# Altium PCB DRIVER_GATE_BOARD_solar_boost_converter.PcbDoc
Units mm, origin at the board's own origin, x right, y up, seen from the top; angles counter-clockwise.
Board outline 30 x 30 mm, 2 copper layers (Top Layer, Bottom Layer), stack 2.071 mm thick; 23 components, 18 nets, 69 pads, 8 vias.
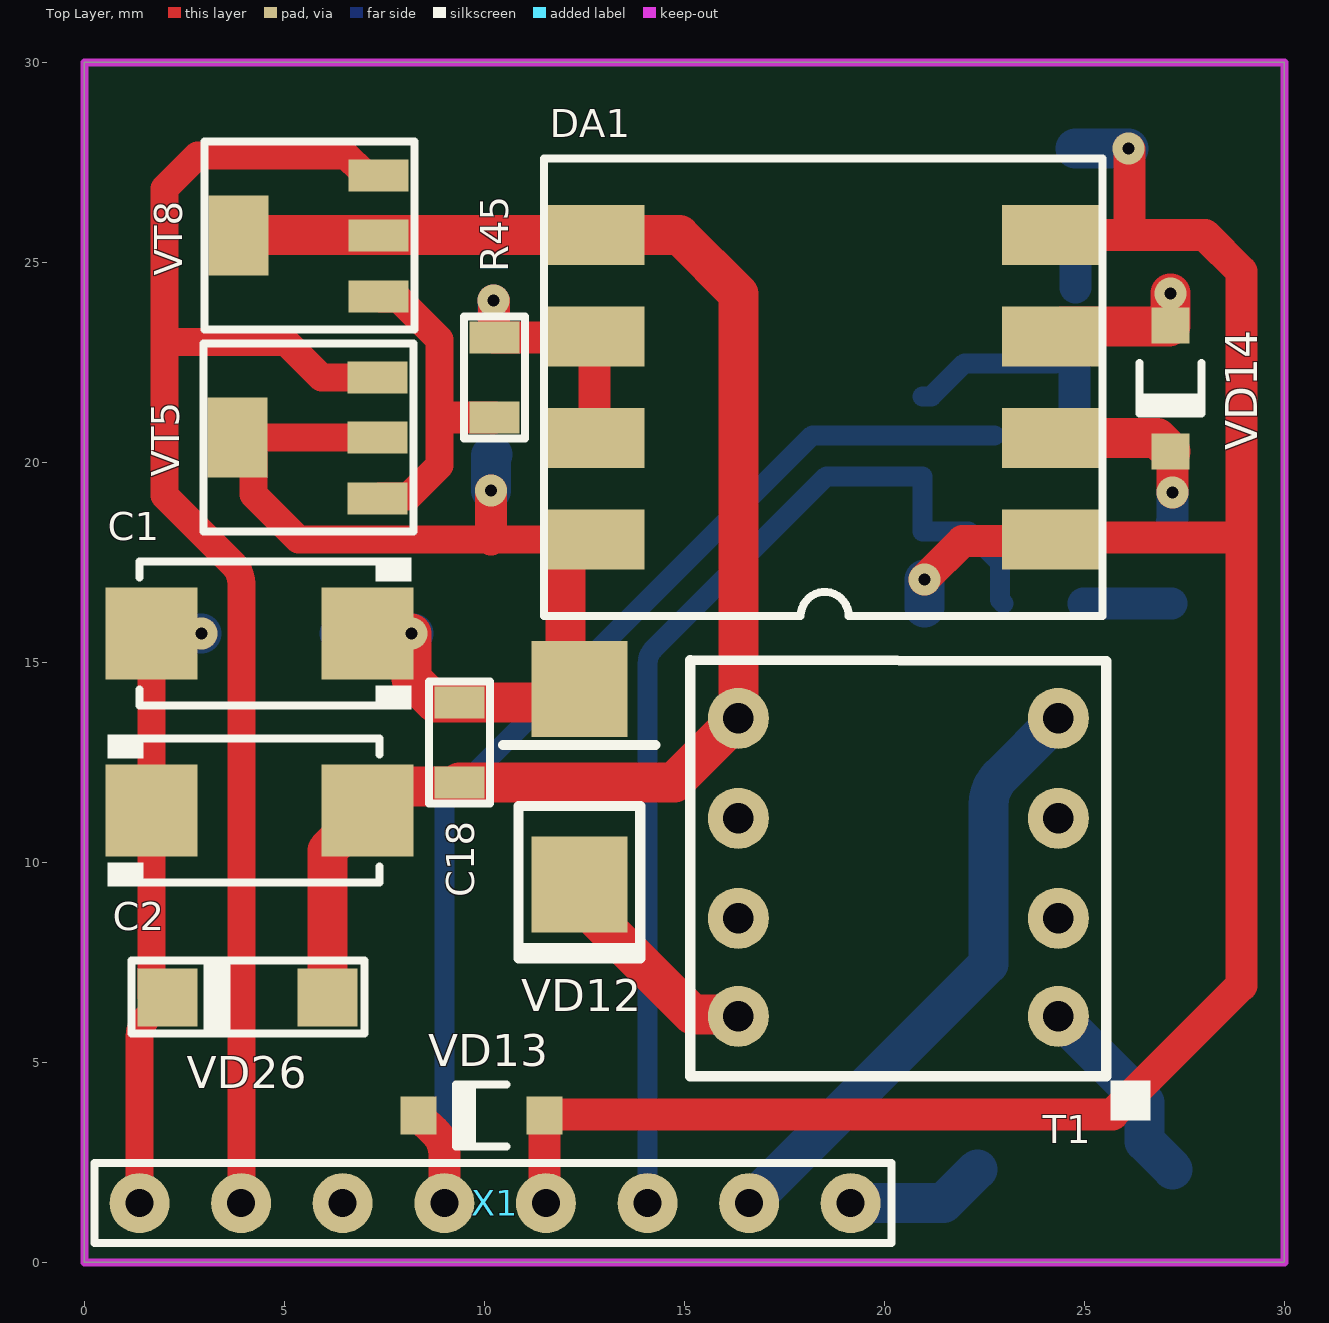
[diagram p0: Top Layer view]
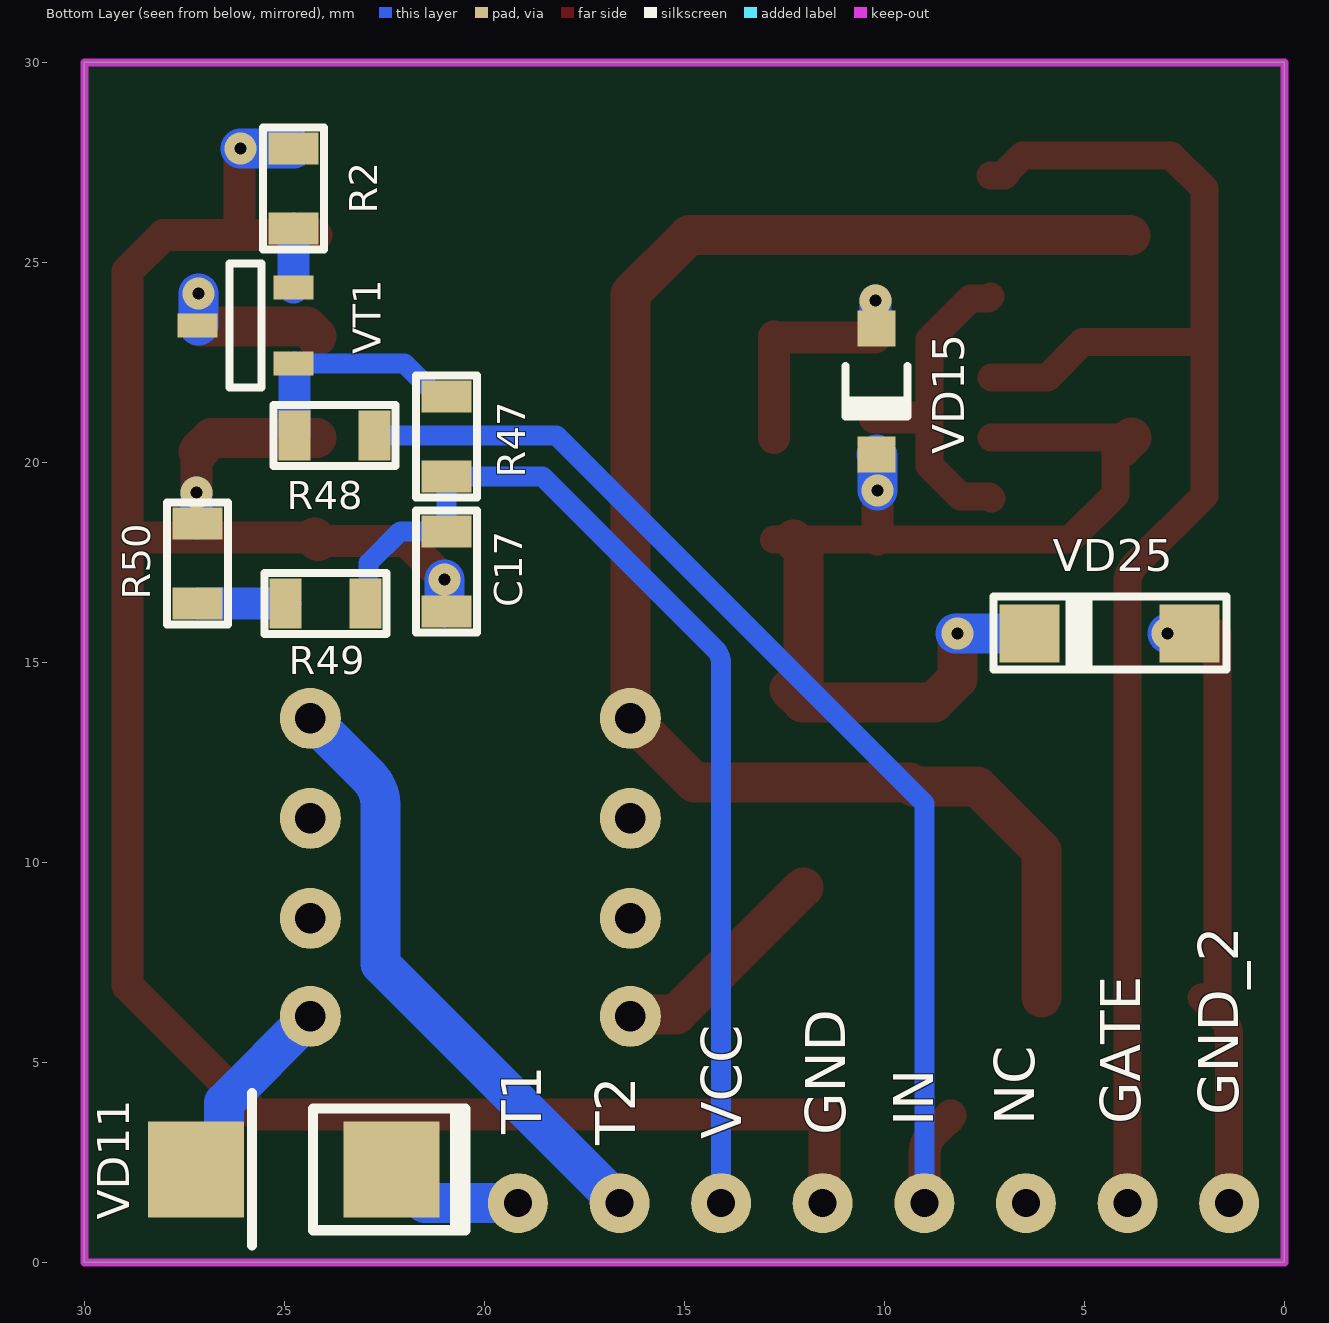
[diagram p1: Bottom Layer view, seen from below]
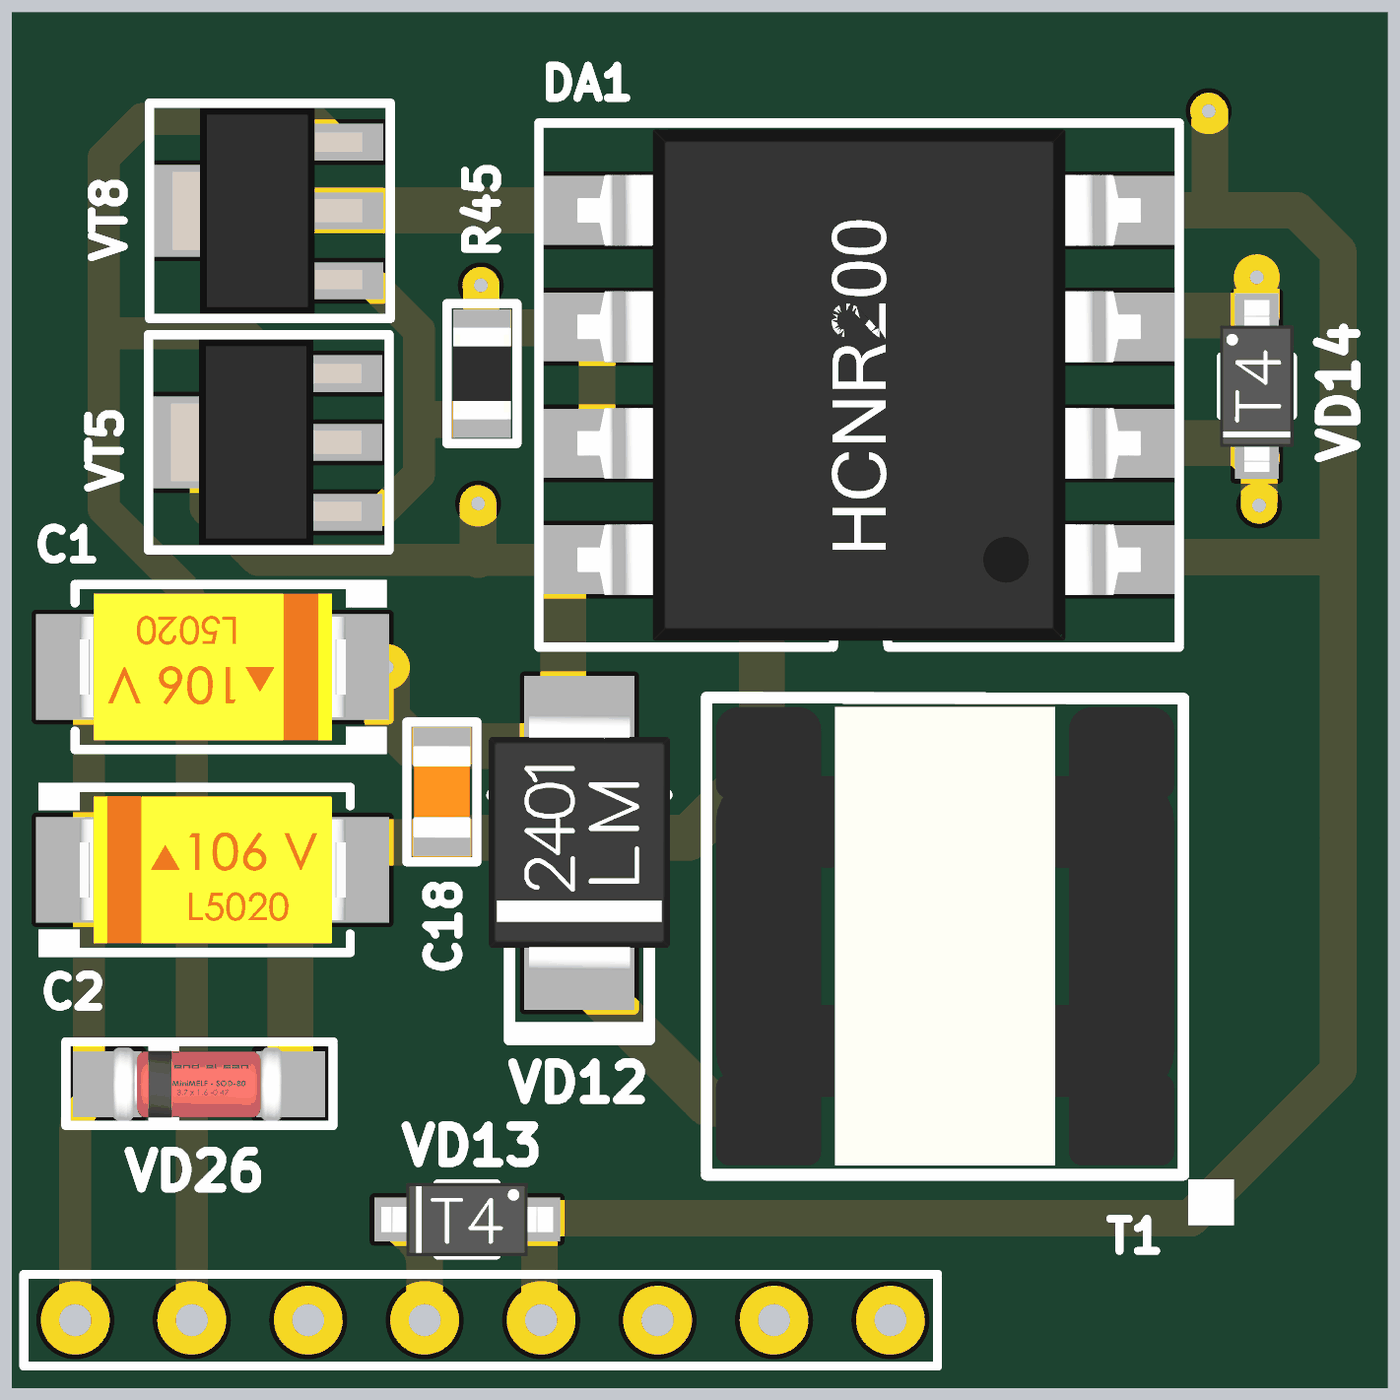
[diagram p2: 3D render of the assembled board from above, using the file's embedded part models]
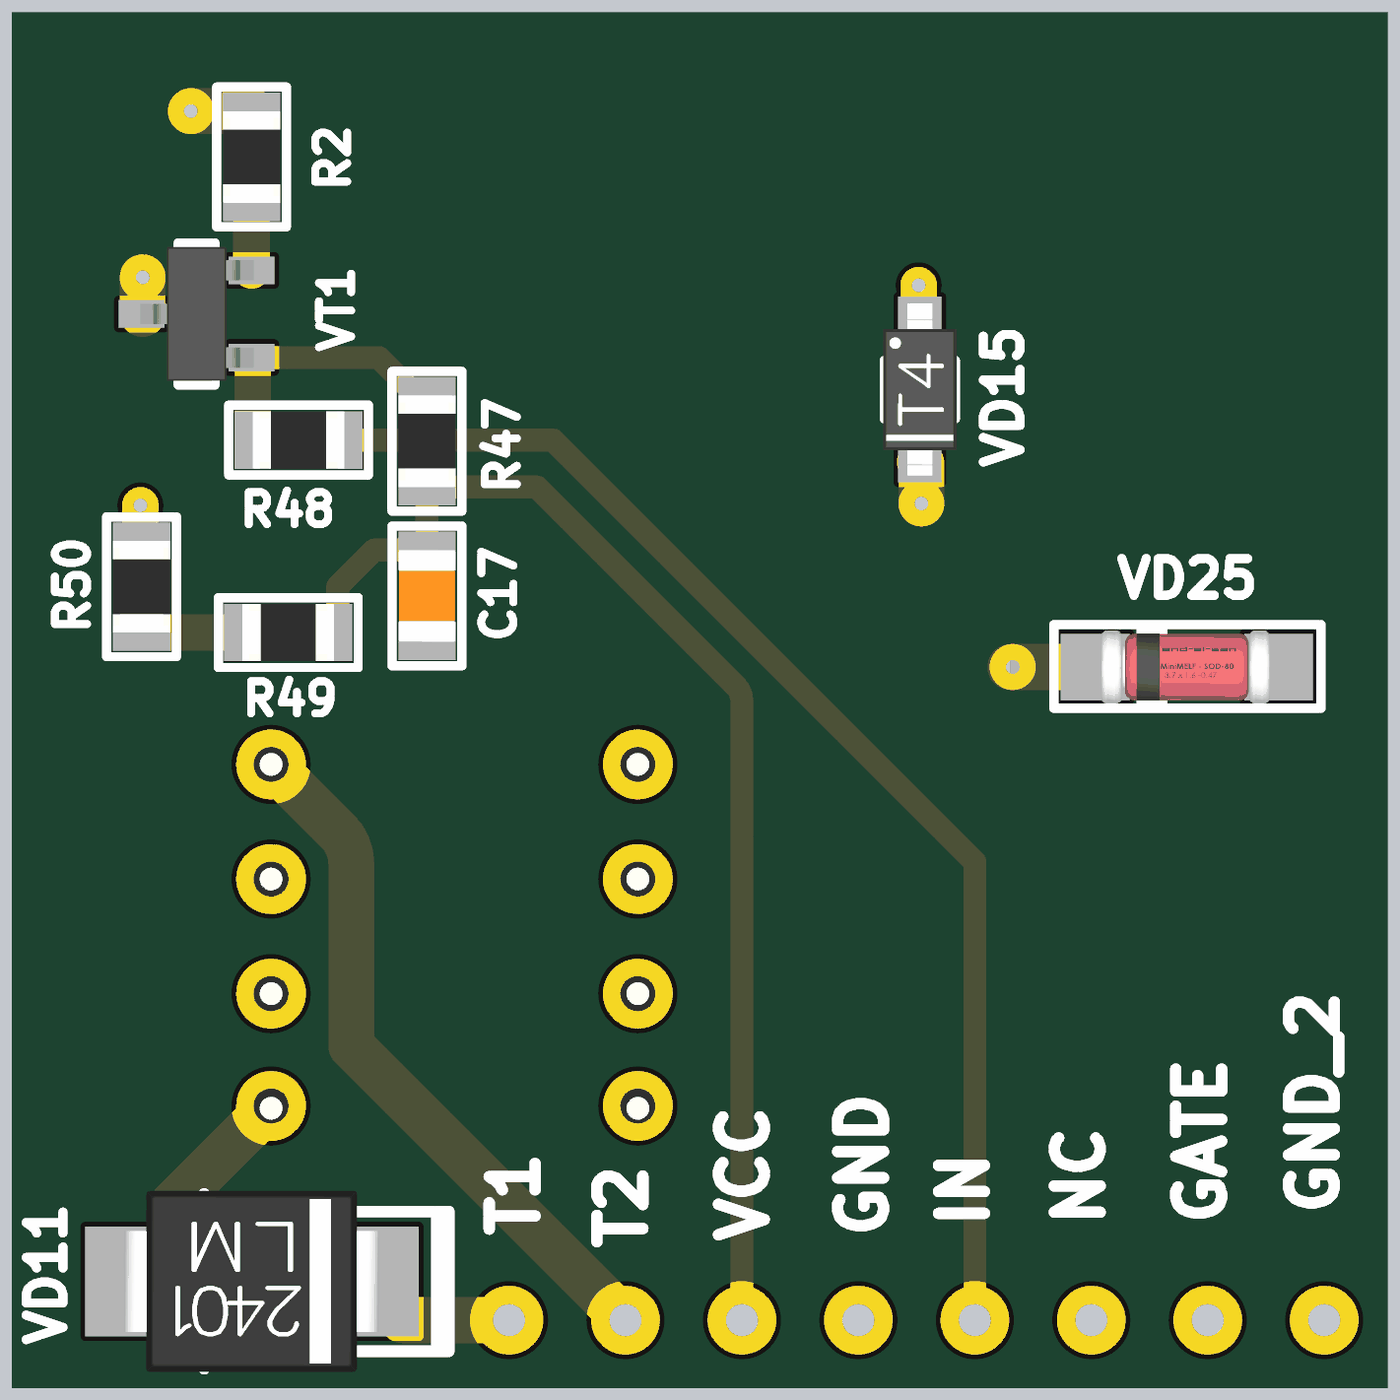
[diagram p3: 3D render of the assembled board from below, using the file's embedded part models]

## Layer stack, top to bottom
Top Solder: solder mask 0.0102, Solder Resist, Dk 3.5
Top Layer: signal copper 0.0356
Dielectric 1: dielectric 2, FR-4, Dk 4.8
Bottom Layer: signal copper 0.0356
Bottom Solder: solder mask 0.0102, Solder Resist, Dk 3.5

## Board outline
0,0 0,29.999 0,30 30,30 30,0

## Design rules (kind name [scope] priority, off if disabled: settings)
Clearance [All] p1: gap=0.8 ignorepadtopadclearanceinfootprint=TRUE except(0: Via-Hole Fill-Hole Text-Hole; 0.2: Arc-Track Arc-SMDPad Arc-THPad Arc-Via Arc-Fill Arc-Poly Arc-Region Arc-Text Arc-Hole; 0.25: Track-Track Track-SMDPad Track-THPad Track-Via Track-Fill Track-Poly Track-Region Track-Text Track-Hole; 0.254: Via-Via Via-Fill Via-Poly Via-Region Via-Text Fill-Fill Fill-Poly Fill-Region Fill-Text Text-Text; 0.4: Arc-Arc SMDPad-SMDPad SMDPad-THPad SMDPad-Via SMDPad-Fill SMDPad-Poly SMDPad-Region SMDPad-Text SMDPad-Hole)
ComponentClearance [All] p1: gap=-5 collisioncheckmode=3 verticalgap=0.254 showdistances=FALSE
DiffPairsRouting [All] p1: maxlimit=5 minlimit=0.254 mostfreqgap=0.254 toplayer_minwidth=0.381 toplayer_maxwidth=0.381 toplayer_prefwidth=0.381 bottomlayer_minwidth=0.381 bottomlayer_maxwidth=0.381 bottomlayer_prefwidth=0.381 maxuncoupledlength=12.7
Height [All] p1: minheight=0 maxheight=150 prefheight=50
MinimumSolderMaskSliver [All] p1: minsoldermaskwidth=0.15
PlaneClearance [All] p1: clearance=0.7
PlaneConnect [All] p1: planeconnectstyle=Direct reliefexpansion=0.508 reliefentries=4 reliefconductorwidth=0.254 reliefairgap=0.5
PolygonConnect [All] p1: connectstyle=Relief reliefconductorwidth=0.2 reliefentries=4 polygonreliefangle="90 Angle" airgapwidth=0.2
RoutingVias [All] p1: holewidth=0.711 width=1.27 viastyle="Through Hole" minholewidth=0.711 minwidth=1.27 maxholewidth=0.711 maxwidth=1.27
SilkToSilkClearance [All] p1: silktosilkclearance=0.15
SilkToSolderMaskClearance [IsPad] p1: minsilkscreentomaskgap=0.15 clearancetoexposedcopper=TRUE
SolderMaskExpansion [All] p1: expansion=0.102 istentingtop=FALSE
Width [All] p1: maxlimit=7 minlimit=0.254 preferedwidth=2 minimp=50.000000 maximp=50.000000 favimp=50.000000
22 further rules are at their usual default settings.

## Components (designator, comment, footprint, x,y, rotation, side; value= is the part's Value field where it differs from the comment)
C1 "CAP-POLAR" CAP-TAN-C 4.375,15.725 r180 top
C2 "CAP-POLAR" CAP-TAN-C 4.375,11.3 r0 top
C17 "100nF" CAP-0805 20.95,17.275 r90 bottom
C18 "100nF" CAP-0805 9.375,13 r270 top
DA1 "ACPL-T350" ACPL-T350 18.475,21.875 r180 top locked
R2 "330" RES-0805 24.775,26.85 r90 bottom
R45 "20" RES-0805 10.25,22.125 r270 top
R47 "1K5" RES-0805 20.95,20.65 r270 bottom
R48 "100" RES-0805 23.75,20.675 r0 bottom
R49 "0" RES-0805 23.975,16.475 r180 bottom
R50 "499" RES-0805 27.175,17.475 r270 bottom
T1 "TRANS_EE10" TRANS_EE10 20.35,9.85 r180 top locked
VD11 "US2M" DO-214AA 26.825,2.325 r180 bottom
VD12 "US2M" DO-214AA 12.375,13.95 r270 top
VD13 "1N4148" DIOD-SOD123-2_V 9.925,3.675 r180 top
VD14 "1N4148" DIOD-SOD123-2_V 27.15,21.85 r270 top
VD15 "1N4148" DIOD-SOD123-2_V 10.2,21.775 r270 bottom
VD25 "" SOD-80 4.375,15.725 r180 bottom
VD26 "" SOD-80 4.075,6.625 r0 top
VT1 "BC847-BEC" SOT23-3 25.975,23.425 r0 bottom
VT5 "2SC2655" SOT-89 5.325,20.625 r90 top
VT8 "2SA1020" SOT-89 5.35,25.675 r90 top
X1 "CONN-8-PIN" CONN-PLS-8-2.54mm 19.16,1.478 r180 top locked

## Footprints (in the part's own frame and the unit in brackets; to place one, negate y for a bottom-side part, rotate by r counter-clockwise, add the part's x,y. Pads: shape width x height; smd on the part's side, far side on the other; paste and mask are expansions set on the pad)
ACPL-T350 [mm]
  rect 2.5x1.5 smd: 1(-5.715,3.81) 2(-5.715,1.27) 3(-5.715,-1.27) 4(-5.715,-3.81) 5(5.715,-3.81) 6(5.715,-1.27) 7(5.715,1.27) 8(5.715,3.81)
  silkscreen extent -6.98,-5.72 6.98,5.72, body extent -6.15,-5.58 6.15,5.58, height 4.75
CAP-0805 [mm]
  rect 0.8x1.25 smd mask+0.015: 1(-1,0) 2(1,0)
  silkscreen extent -1.52,-0.76 1.52,0.76, body extent -1,-0.62 1,0.63, height 0.8
CAP-TAN-C [mm]
  rect 2.3x2.3 smd: 1(-2.7,0) 2(2.7,0)
  silkscreen extent -3.8,-1.9 3,1.9, body extent -2.9,-1.6 2.9,1.6, height 2.6
CONN-PLS-8-2.54mm [mm]
  round 1.5 hole 0.7: 1(0,0) 2(2.54,0) 3(5.08,0) 4(7.62,0) 5(10.16,0) 6(12.7,0) 7(15.24,0) 8(17.78,0)
  silkscreen extent -1.02,-1 18.9,1
DIOD-SOD123-2_V [mm] "SOD123, 2-Leads, Body 2.7x1.55mm, Height 1.45mm"
  rect 0.9x0.95 smd: 1(1.575,0) 2(-1.575,0)
  silkscreen extent -0.64,-0.83 0.64,0.77, body extent -1.88,-0.8 1.88,0.8, height 1.3
DO-214AA [mm]
  rect 2.4x2.4 smd: 1(-0.381,0) 2(4.5,0)
  silkscreen extent 1.02,-1.91 6.35,1.91, body extent -0.75,-1.97 4.85,1.97, height 2.65
RES-0805 [mm]
  rect 0.8x1.25 smd mask+0.015: 1(-1,0) 2(1,0)
  silkscreen extent -1.52,-0.76 1.52,0.76, body extent -1,-0.62 1,0.63, height 0.6
SOD-80 [mm]
  rect 1.5x1.45 smd: 1(-2,0) 2(2,0)
  silkscreen extent -2.9,-0.9 2.93,0.92, body extent -1.88,-0.79 1.82,0.79, height 1.6
SOT23-3 [mm]
  rect 1x0.6 smd: 1(-1.2,0.95) 2(-1.2,-0.95) 3(1.2,0)
  silkscreen extent -0.4,-1.55 0.4,1.55, body extent -1.25,-1.46 1.23,1.46, height 1.02
SOT-89 [mm]
  rect 0.8x1.5 smd: 1(-1.525,-2) 2(0,-2) 3(1.5,-2)
  rect 2x1.5 smd: 2(0,1.5)
  silkscreen extent -2.35,-2.9 2.35,2.35, body extent -2.25,-2.29 2.25,1.86, height 1.5
TRANS_EE10 [mil]
  round 60 hole 30: 1(-157.48,145.67) 2(-157.48,49.21) 3(-157.48,-49.21) 4(-157.48,-147.64) 5(157.48,-147.64) 6(157.48,-49.21) 7(157.48,49.21) 8(157.48,145.67)
  silkscreen extent -248,-205 205,248, body extent -197,-197 197,197, height 472

## Part data
C17 C18: library part CAP-NON-POLAR
R2 R45 R47 R48 R49 R50: library part RES-CONST
VD11 VD12 VD13 VD14 VD15: library part DIODE
VD25 VD26: library part ZENER
VT5: library part BIPOLAR-NPN-BEC
VT8: library part BIPOLAR-PNP-BCE

## Via types
v1: diameter 0.8, hole 0.3, Top Layer to Bottom Layer, 8 vias

## Nets (pads, with @x,y where several pads share a name; then routed paths per layer and width w, separated by ;. In a path a pad name is that pad's centre, name@x,y a point inside that pad or via, vN(x,y) a via of type N, cw(c..) or ccw(c..) an arc to the next point about the centre after c; other vN are vias at no path point)
1/2_VCC: C1.2 C2.1 VD25.2 VD26.1 X1.8 | length 16.3
  Top Layer w0.7: X1.8 1.38,5.64 cw(c2.08,5.64) 1.584,6.134 VD26.1 ; VD26.1@1.675,6.65 C2.1 C1.2 v1(2.925,15.725)
  Bottom Layer w1: VD25.2 v1(2.925,15.725)
GATE: VT5.3 VT8.3 X1.7 | length 38
  Top Layer w0.7: X1.7@3.925,1.189 3.921,1.406 ccw(c3.225,1.479) 3.925,1.479 3.925,16.96 ccw(c3.225,16.96) 3.72,17.455 2,19.175 2,23.007 ; VT5.3 5.925,22.125 5.043,23.007 2,23.007 ; VT8.3 7,27.175 6.95,27.225 6.95,27.265 6.54,27.675 2.835,27.675 2,26.84 2,23.007
GND: C2.2 C18.2 DA1.5 T1.5 VD26.2 VT8.2 | length 39
  Top Layer w1: VT8.2@3.85,25.675 3.86,25.685 7.35,25.685 DA1.5 12.762,25.683 14.879,25.683 16.35,24.212 T1.5 14.75,12 C18.2 9.275,11.9 7.675,11.9 6.075,10.3 VD26.2
GND_1: C17.1 DA1.1 DA1.4 R2.2 VD13.2 X1.4 | length 56.8
  Top Layer w0.8: X1.4@11.5,1.196 11.518,1.324 cw(c12.3,1.493) 11.5,1.493 11.5,3.7 25.7,3.7 28.925,6.925 28.925,18.12 ; v1(21,17.075) 21.954,18.029 DA1.1@24.154,18.029 ; DA1.4 26.125,25.685 ; DA1.1@24.25,18.125 24.255,18.12 28.925,18.12 ; v1@26.125,27.825 26.125,25.685 ; 26.125,25.685 28.015,25.685 28.925,24.775 28.925,18.12
  Top Layer w1: DA1.1@24.154,18.029 DA1.1@24.25,18.125
  Bottom Layer w1: C17.1@21,16.375 v1(21,17.075) ; R2.2 v1(26.1,27.85)
NetC17_2: C17.2 R47.2 R49.2 X1.3 | length 27.5
  Bottom Layer w0.5: X1.3@14.08,1.084 14.08,14.973 cw(c14.58,14.973) 14.226,15.326 18.55,19.65 R47.2 C17.2 22.1,18.275 22.895,17.48 22.895,16.556 R49.2
NetDA1_2: DA1.2 R50.1 VD14.1 | length 4.9
  Top Layer w0.8: VD14.1 27.2,20.225 v1(27.2,19.25)
  Top Layer w1: DA1.2 26.82,20.605 VD14.1
  Bottom Layer w0.8: R50.1 27.2,18.475 v1(27.2,19.25)
NetDA1_3: DA1.3 VD14.2 VT1.3 | length 4.7
  Top Layer w1: DA1.3 24.44,23.395 27.12,23.395 VD14.2 v1(27.15,24.225)
  Bottom Layer w1: VT1.3@27.15,23.425 v1(27.15,24.225)
NetDA1_6: DA1.6 DA1.7 R45.1 VD15.2 | length 6.7
  Top Layer w0.8: v1(10.225,24.05) 10.238,24.037 10.238,23.125 R45.1 DA1.6@12.74,23.125 ; DA1.7 DA1.6
  Bottom Layer w0.8: VD15.2 10.225,23.375 v1(10.225,24.05)
NetR2_1: R2.1 VT1.2 | length 1.5
  Bottom Layer w0.8: VT1.2 R2.1
NetR45_2: R45.2 VT5.1 VT8.1 | length 8.4
  Top Layer w0.3: 8.875,21.205 8.955,21.125
  Top Layer w0.7: VT5.1 7.375,19.15 8.1,19.15 8.875,19.925 8.875,21.205 8.875,23.075 7.85,24.1 7.4,24.1 VT8.1
  Top Layer w0.8: 8.955,21.125 R45.2
NetR47_1: R47.1 R48.2 VT1.1 | length 5.4
  Bottom Layer w0.5: R47.1 21.175,21.65 22,22.475 24.275,22.475
  Bottom Layer w0.8: R48.2 VT1.1@24.75,22.375
NetR48_1: R48.1 VD13.1 X1.5 | length 30.3
  Top Layer w0.8: VD13.1 8.4,3.6 8.745,3.28 cw(c8.2,2.694) 9,2.694 X1.5
  Bottom Layer w0.5: X1.5@9,1.2 9,11.475 18.2,20.675 R48.1
NetR49_1: R49.1 R50.2 | length 2.2
  Bottom Layer w0.8: R49.1 26.95,16.475 R50.2
NetT1_1: T1.1 VD11.1 | length 5
  Bottom Layer w1: T1.1 26.506,3.994 26.506,3.025 VD11.1
NetT1_4: T1.4 X1.2 | length 15.3
  Bottom Layer w1: X1.2 22.6,7.458 22.6,11.436 cw(c23.6,11.436) 22.892,12.142 T1.4
NetT1_8: T1.8 VD12.2 | length 5.7
  Top Layer w1: VD12.2@12.025,9.375 15.201,6.199 16.301,6.199 T1.8
NetVD11_2: VD11.2 X1.1 | length 3.5
  Bottom Layer w1: X1.1 21.478,1.478 VD11.2
VCC: C1.1 C18.1 DA1.8 VD12.1 VD15.1 VD25.1 VT5.2 | length 27.5
  Top Layer w0.7: VT5.2@4.075,20.375 4.225,20.225 4.225,19.2 5.36,18.065 10.166,18.065 12.275,18.065 DA1.8 ; VT5.2@4.089,20.625 VT5.2@7.325,20.625
  Top Layer w0.8: 10.166,18.065 v1(10.166,19.291)
  Top Layer w1: VT5.2@3.825,20.625 VT5.2@4.075,20.375 ; v1(8.175,15.725) 8.175,14.586 8.761,14 12.044,14 VD12.1 ; VD12.1@12.025,14.256 12.025,17.815 DA1.8@12.275,18.065
  Bottom Layer w1: VD25.1 v1@8.225,15.725 ; v1(10.166,19.291) 10.166,20.166 VD15.1
pads on no net: T1.2 T1.3 T1.6 T1.7 X1.6

## Keep-outs
Keep-Out Layer:
  lines w0.2: 0,29.999 0,0 30,0 30,30 0,30 ; 9.785,0 9.785,0

## Silkscreen, mask and mechanical layers (free items; w line width, h text height)
Bottom Overlay:
  text "GND_2" at 1.146,3.679 h1 r270
  text "GATE" at 3.604,3.454 h1 r270
  text "NC" at 6.254,3.429 h1 r270
  text "IN" at 8.779,3.404 h1 r270
  text "T1" at 18.579,3.204 h1 r270
  text "GND" at 10.979,3.179 h1 r270
  text "VCC" at 13.579,3.079 h1 r270
  text "T2" at 16.229,2.929 h1 r270